# Altium PCB PDB_first.PcbDoc
Units mm, origin at the board's own origin, x right, y up, seen from the top; angles counter-clockwise.
Board outline 197.49 x 119.01 mm, 2 copper layers (Top Layer, Bottom Layer); 57 components, 42 nets, 148 pads, 301 vias.
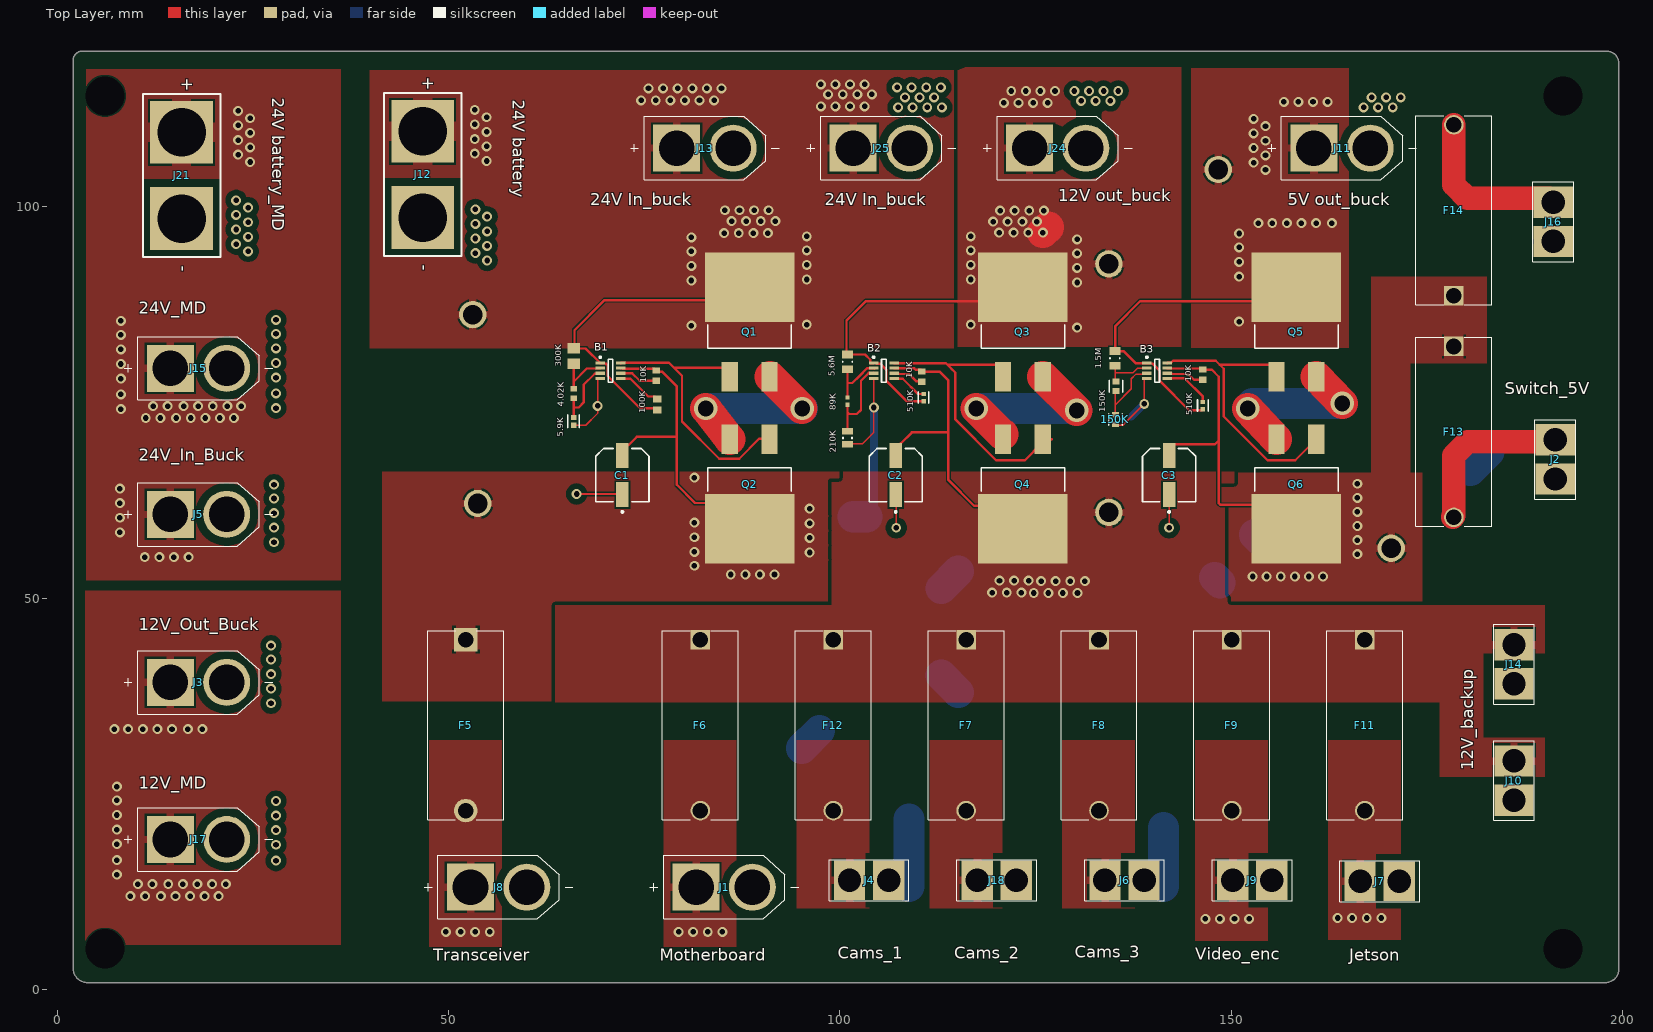
[diagram p0: Top Layer view]
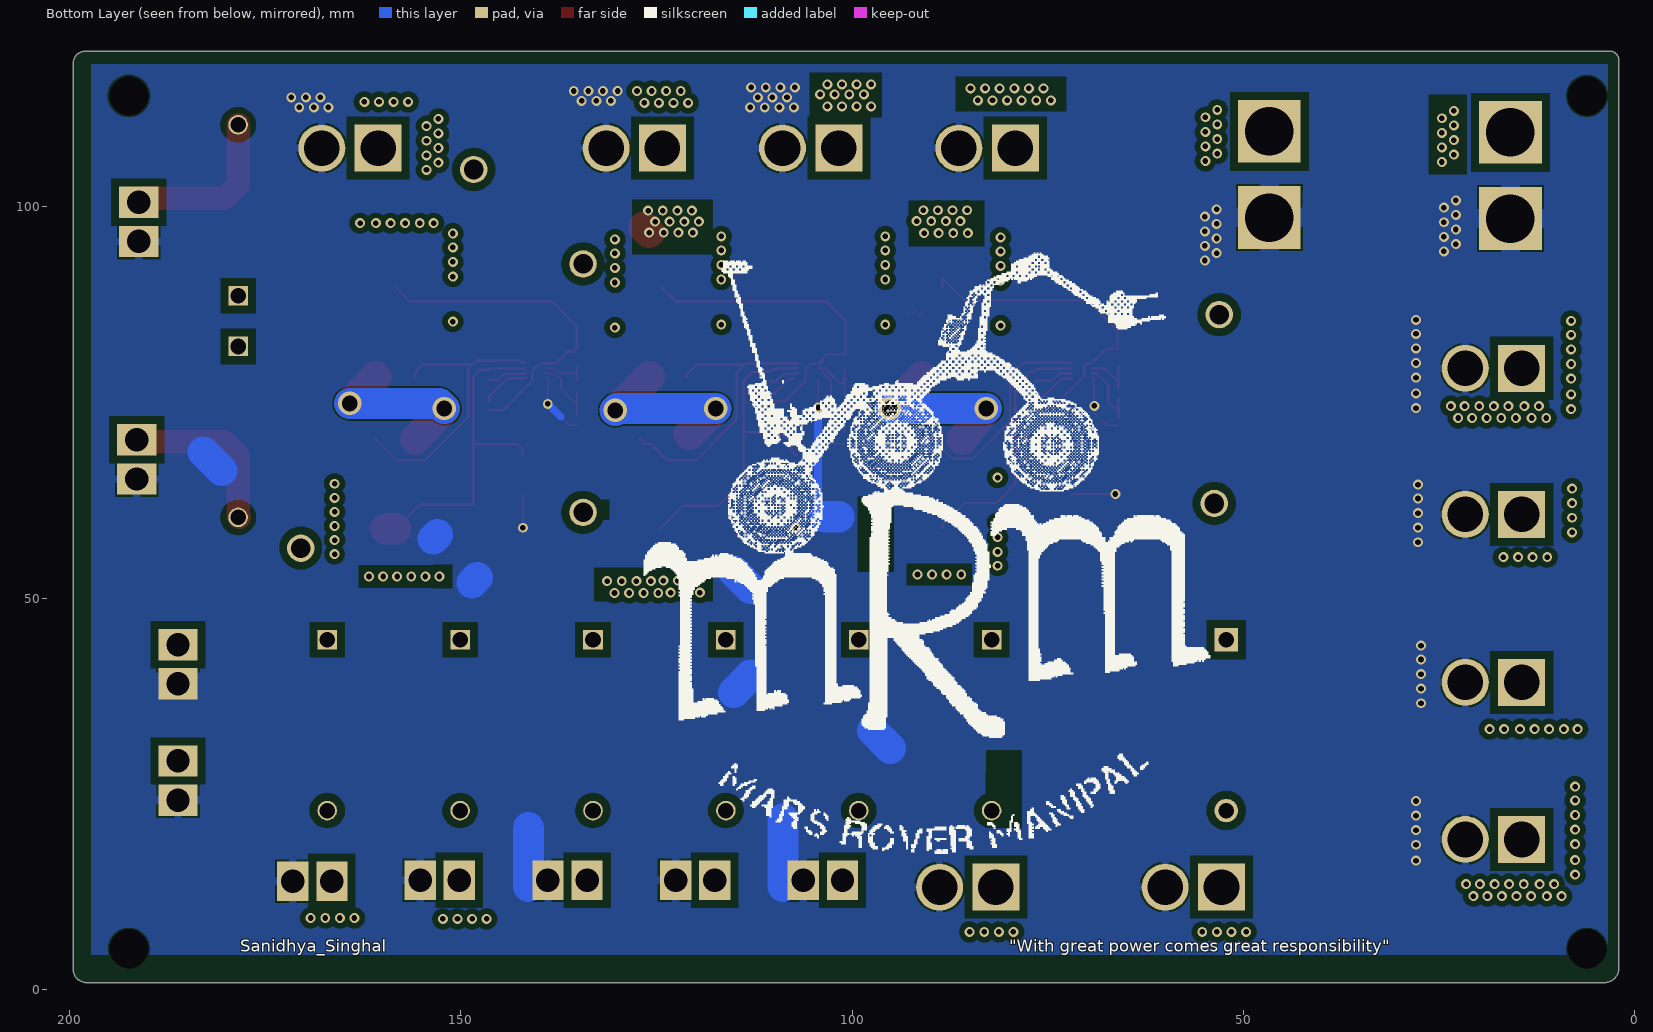
[diagram p1: Bottom Layer view, seen from below]
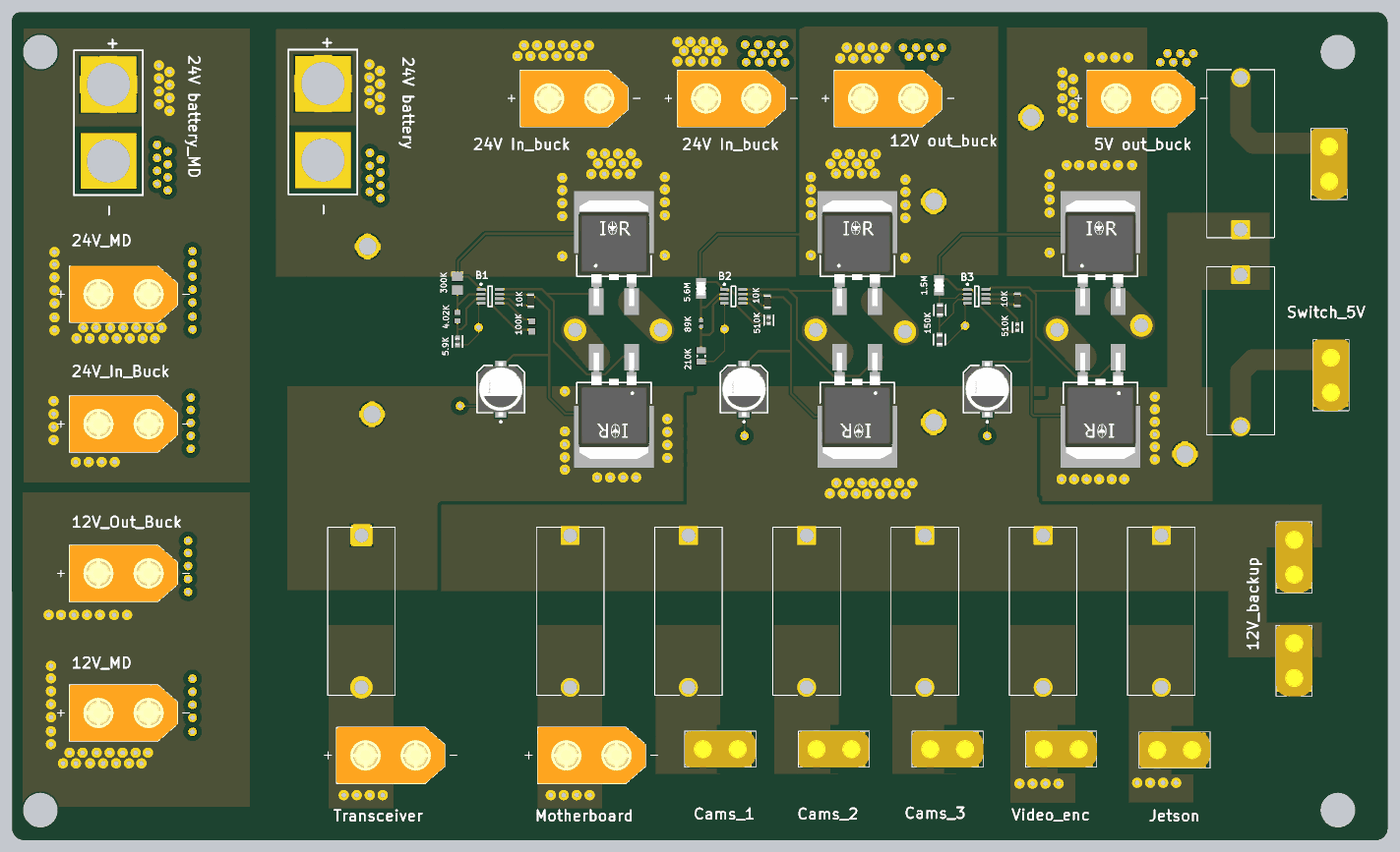
[diagram p2: 3D render of the assembled board from above, using the file's embedded part models]

## Layer stack, top to bottom
Top Solder: solder mask 0.0102, Solder Resist, Dk 3.5
Top Layer: signal copper 0.0356
Dielectric 1: dielectric 0.32, FR-4, Dk 4.8
Bottom Layer: signal copper 0.0356
Bottom Solder: solder mask 0.0102, Solder Resist, Dk 3.5

## Board outline
2.032,2.698 2.026,118.742 cw(c3.18,118.742) 3.18,119.896 198.115,119.888 197.988,119.893 cw(c197.988,118.364) 199.517,118.364 199.517,2.6 cw(c197.808,2.6) 197.808,0.891 3.841,0.889 cw(c3.841,2.698)

## Design rules (kind name [scope] priority, off if disabled: settings)
Clearance [All] p1: gap=0.2 ignorepadtopadclearanceinfootprint=FALSE except(0.5: Poly-Poly; 0.7: Via-Fill Via-Poly Via-Region; 1: THPad-Fill THPad-Poly THPad-Region)
PlaneClearance [All] p1: clearance=2
PlaneConnect [All] p1: planeconnectstyle=Direct reliefexpansion=0.508 reliefentries=4 reliefconductorwidth=0.254 reliefairgap=1
PolygonConnect [All] p1: thpad.connectstyle=Relief thpad.reliefconductorwidth=1 thpad.reliefentries=4 thpad.polygonreliefangle="90 Angle" thpad.airgapwidth=0.254 smdpad.connectstyle=Direct smdpad.reliefconductorwidth=1 smdpad.reliefentries=4 smdpad.polygonreliefangle="90 Angle" smdpad.airgapwidth=0.254 via.connectstyle=Direct via.reliefconductorwidth=1 via.reliefentries=4 via.polygonreliefangle="90 Angle" via.airgapwidth=0.254
RoutingTopology [All] p1: topology=Daisy_Balanced
RoutingVias [All] p1: holewidth=0.711 width=1.27 viastyle="Through Hole" minholewidth=0.711 minwidth=1.27 maxholewidth=0.711 maxwidth=1.27
SolderMaskExpansion [All] p1: expansion=0.102 istentingtop=FALSE
SupplyNets "Schematic Supply Nets_2" [InNet('VCC')] p1: voltage=0.000
SupplyNets "Schematic Supply Nets_1" [InNet('+5')] p2: voltage=0.000
SupplyNets "Schematic Supply Nets_3" [InNet('+12')] p3: voltage=0.000
SupplyNets "Schematic Supply Nets" [InNet('GND')] p4: voltage=0.000
Width [All] p1: maxlimit=20 minlimit=0.05 preferedwidth=5 minimp=50.000000 maximp=50.000000 favimp=50.000000
27 further rules are at their usual default settings.

## Classes and differential pairs
component class PDB_first: 1 2 3 4 5 7 8 B1 B2 B3 C1 C2 C3 F? J6 J8 J13 J15 J17 J18 J19 J20 J21 Q2 Q4 Q5

## Components (designator, comment, footprint, x,y, rotation, side; value= is the part's Value field where it differs from the comment)
1.5M "Comment" FP-CRCW0805-e3-IPC_B 135.128,80.645 r90 top
4.02K "4.02K" RESC1608X55X30LL15T15 65.979,76.144 r90 top (schematic designator R2)
5.6M "Comment" RESC1005X40X25NL05T05 100.965,75.184 r90 top
5.9K "5.9K" FP-ERJ2RK-IPC_A 65.979,72.588 r270 top (schematic designator R1)
10K "CRCW060310K0FKEA" RESC1609X50X30NL8T20 146.37,78.557 r90 top (schematic designator R15)
10K "CRCW060310K0FKEA" RESC1609X50X30NL8T20 110.473,78.303 r90 top (schematic designator R10)
10K "CRCW060310K0FKEA" RESC1609X50X30NL8T20 76.52,78.43 r90 top (schematic designator R5)
89K "Comment" FP-CRCW0805-e3-IPC_B 100.965,80.199 r90 top
100K "100K" RESC1608X55X30ML15T15 76.648,74.743 r270 top (schematic designator R4)
150K "Comment" FP-CRCW0603-e3-IPC_C 135.255,77.089 r90 top
150K "Comment" FP-CRCW0603-e3-IPC_C 135.194,72.837 r90 top
210K "Comment" RESC2013X50X30LL20T20 100.965,70.485 r90 top
300K "300K" RESC2013X70X40ML20T20 65.979,80.937 r90 top (schematic designator R3)
510K "ERJ-2RKF5103X" FP-ERJ2RK-IPC_B 146.37,74.62 r270 top (schematic designator R14)
510K "ERJ-2RKF5103X" FP-ERJ2RK-IPC_B 110.683,75.636 r270 top (schematic designator R9)
B1 "LTC4365ITS8#TRMPBF" LT-TS8-8-TSOT-23_V 70.679,79.065 r0 top
B2 "LTC4365ITS8#TRMPBF" LT-TS8-8-TSOT-23_V 105.603,79.065 r0 top
B3 "LTC4365ITS8#TRMPBF" LT-TS8-8-TSOT-23_V 140.528,79.065 r0 top
C1 "EEEFT1V101AP" FP-FTD-MFG 72.203,65.73 r90 top
C2 "EEEFT1V101AP" FP-FTD-MFG 107.127,65.73 r90 top
C3 "EEEFT1V101AP" FP-FTD-MFG 142.052,65.73 r90 top
F5 "4527" FUSE_4527#1 52.197,33.782 r270 top
F6 "4527" FUSE_4527#2 82.169,33.782 r270 top
F7 "4527" FUSE_4527#2 116.123,33.782 r270 top
F8 "4527" FUSE_4527#2 133.1,33.782 r270 top
F9 "4527" FUSE_4527#2 150.076,33.782 r270 top
F11 "4527" FUSE_4527#2 167.053,33.782 r270 top
F12 "4527" FUSE_4527#2 99.146,33.782 r270 top
F13 "4527" FUSE_4527#2 178.435,71.249 r270 top
F14 "4527" FUSE_4527#3 178.435,99.57 r270 top
J1 "XT60-M" AMASS_XT60-M#1 85.217,13.081 r0 top
J2 "XT30PB" XT30PB 191.389,70.231 r0 top
J3 "XT60-M" AMASS_XT60-M#1 18.034,39.243 r0 top
J4 "XT30PB" XT30PB 101.219,13.97 r90 top
J5 "XT60-M" AMASS_XT60-M#1 18.034,60.706 r0 top
J6 "XT30PB" XT30PB 133.858,13.97 r90 top
J7 "XT30PB" XT30PB 166.45,13.843 r90 top
J8 "XT60-M" AMASS_XT60-M#1 56.388,13.081 r0 top
J9 "XT30PB" XT30PB 150.177,13.97 r90 top
J10 "XT30PB" XT30PB 186.121,29.201 r0 top
J11 "XT60-M" AMASS_XT60-M#1 164.15,107.513 r0 top
J12 "xt90" xt90 46.675,104.14 r270 top
J13 "XT60-M" AMASS_XT60-M#1 82.743,107.513 r0 top
J14 "XT30PB" XT30PB 186.121,44.06 r0 top
J15 "XT60-M" AMASS_XT60-M#1 18.034,79.375 r0 top
J16 "XT30PB" XT30PB 191.135,100.584 r0 top
J17 "XT60-M" AMASS_XT60-M#1 18.034,19.177 r0 top
J18 "XT30PB" XT30PB 117.538,13.97 r90 top
J21 "xt90" xt90 15.875,104.013 r270 top (schematic designator J13)
J24 "XT60-M" AMASS_XT60-M#1 127.828,107.513 r0 top
J25 "XT60-M" AMASS_XT60-M#2 105.285,107.513 r0 top
Q1 "IRLZ44NSTRLPBF" FP-PG-TO263-3-MFG 88.458,85.288 r0 top
Q2 "IRLZ44NSTRLPBF" FP-PG-TO263-3-MFG 88.458,63.317 r180 top
Q3 "IRLZ44NSTRLPBF" FP-PG-TO263-3-MFG 123.383,85.288 r0 top
Q4 "IRLZ44NSTRLPBF" FP-PG-TO263-3-MFG 123.383,63.317 r180 top
Q5 "IRLZ44NSTRLPBF" FP-PG-TO263-3-MFG 158.308,85.288 r0 top
Q6 "IRLZ44NSTRLPBF" FP-PG-TO263-3-MFG 158.308,63.317 r180 top

## Footprints (in the part's own frame and the unit in brackets; to place one, negate y for a bottom-side part, rotate by r counter-clockwise, add the part's x,y. Pads: shape width x height; smd on the part's side, far side on the other; paste and mask are expansions set on the pad)
AMASS_XT60-M#1 [mm]
  round 6 hole 4.55: N(3.6,0)
  rect 6x6 / inner round 6 / far side rect 6x6 hole 4.55: P(-3.6,0)
  silkscreen extent -9.5,-4.05 9.5,4.05, body extent -7.75,-4.05 7.75,4.05, height 16
AMASS_XT60-M#2 [mm]
  round 6 hole 4.55: N(3.6,0)
  rect 6x6 hole 4.55: P(-3.6,0)
  silkscreen extent -9.5,-4.05 9.5,4.05, body extent -7.75,-4.05 7.75,4.05, height 16
FP-CRCW0603-e3-IPC_C [mm]
  rect 0.735x0.862 smd paste+0 mask+0: 1(-0.615,0) 2(0.615,0)
  silkscreen extent -0.75,-0.85 0.75,0.85, body extent -1.08,-0.58 1.08,0.58, height 0.25
FP-CRCW0805-e3-IPC_B [mm]
  rect 1.007x1.408 smd paste+0 mask+0: 1(-0.951,0) 2(0.951,0)
  silkscreen extent -0.07,-0.63 0.07,0.63, body extent -1.7,-0.95 1.7,0.95, height 0.25
FP-ERJ2RK-IPC_A [mm]
  rect 0.668x0.672 smd paste+0 mask+0: 1(-0.502,0) 2(0.502,0)
  silkscreen extent -0.84,-0.74 0.84,0.74, body extent -1.04,-0.54 1.04,0.54, height 0.25
FP-ERJ2RK-IPC_B [mm]
  rect 0.568x0.572 smd paste+0 mask+0: 1(-0.452,0) 2(0.452,0)
  silkscreen extent -0.74,-0.69 0.74,0.69, body extent -0.89,-0.44 0.89,0.44, height 0.25
FP-FTD-MFG [mm]
  rect 3.2x1.6 smd paste+0 mask+0: 1(-2.5,0) 2(2.5,0)
  silkscreen extent -4.82,-3.4 3.4,3.4, body extent -4.35,-3.65 4.35,3.65, height 0.25
FP-PG-TO263-3-MFG [mm]
  rect 2.08x3.81 smd paste+0 mask+0: 1(-2.54,-6.985) 3(2.54,-6.985)
  rect 11.43x8.89 smd paste+0 mask+0: 4(0,4.445)
  silkscreen extent -5.34,-3.36 5.34,-0.38, body extent -5.81,-8.99 5.81,8.99, height 0.25
FUSE_4527#1 [mm]
  rect 3x3 hole 2: 1(-10.92,0)
  round 3 hole 2: 2(10.92,0)
  silkscreen extent -12.08,-4.85 12.08,4.85
FUSE_4527#2 [mm]
  rect 2.5x2.5 hole 2: 1(-10.92,0)
  round 2.5 hole 2: 2(10.92,0)
  silkscreen extent -12.08,-4.85 12.08,4.85
FUSE_4527#3 [mm]
  round 2.5 hole 2: 1(-10.92,0)
  rect 2.5x2.5 hole 2: 2(10.92,0)
  silkscreen extent -12.08,-4.85 12.08,4.85
LT-TS8-8-TSOT-23_V [mm] "SOT23, 8-Leads, Body 2.9x1.75mm, Pitch 0.65mm"
  rect 1.22x0.4 smd: 1(-1.31,0.975) 2(-1.31,0.325) 3(-1.31,-0.325) 4(-1.31,-0.975) 5(1.31,-0.975) 6(1.31,-0.325) 7(1.31,0.325) 8(1.31,0.975)
  silkscreen extent -1.43,-1.45 0.3,1.85, body extent -0.87,-1.45 0.88,1.45, height 1
RESC1005X40X25NL05T05 [mm] "Chip Resistor, 2-Leads, Body 1.00x0.50mm, IPC Medium Density"
  rect 0.55x0.55 smd: 1(-0.45,0) 2(0.45,0)
  body extent -0.53,-0.27 0.53,0.28, height 0.4
RESC1608X55X30LL15T15 [mm] "Chip Resistor, 2-Leads, Body 1.60x0.80mm, IPC High Density"
  rect 0.7x0.85 smd: 1(-0.625,0) 2(0.625,0)
  body extent -0.87,-0.48 0.87,0.48, height 0.55
RESC1608X55X30ML15T15 [mm] "Chip Resistor, 2-Leads, Body 1.60x0.80mm, IPC Low Density"
  rect 0.9x1.05 smd: 1(-0.725,0) 2(0.725,0)
  body extent -0.87,-0.48 0.87,0.48, height 0.55
RESC1609X50X30NL8T20 [mm] "Chip Resistor, 2-Leads, Body 1.65x0.95mm, IPC Medium Density"
  rect 0.8x0.95 smd: 1(-0.65,0) 2(0.65,0)
  body extent -0.82,-0.48 0.82,0.48, height 0.5
RESC2013X50X30LL20T20 [mm] "Chip Resistor, 2-Leads, Body 2.00x1.25mm, IPC High Density"
  rect 0.85x1.35 smd: 1(-0.825,0) 2(0.825,0)
  silkscreen extent -0.1,-0.58 0.1,0.58, body extent -1.1,-0.72 1.1,0.72, height 0.5
RESC2013X70X40ML20T20 [mm] "Chip Resistor, 2-Leads, Body 2.00x1.25mm, IPC Low Density"
  rect 1.35x1.55 smd: 1(-0.975,0) 2(0.975,0)
  body extent -1.1,-0.72 1.1,0.72, height 0.7
XT30PB [mm]
  rect 5x4 hole 3: 1(0,0) 2(0,-5)
  silkscreen extent -2.6,-7.6 2.6,2.6, body extent -2.6,-7.6 2.6,2.6, height 10.66
xt90 [mm]
  rect 8x8 hole 6.2: 1(-5.5,0) 2(5.5,0)
  silkscreen extent -10.4,-4.95 10.4,4.95

## Part data
4.02K: library part CMP-1012-00578-2, Manufacturer=Panasonic, Part Number=ERJ-3EKF4021V
5.9K: library part CMP-2002-01005-2, "RES SMD 5.9K OHM 1% 1/10W 0402", Case Code (Imperial)=0402, Case Code (Metric)=1005, Max Operating Temperature=155°C, Max Power Dissipation=100mW, Min Operating Temperature=-55°C, Package Quantity=1, Resistance=5.9kR, Resistance Tolerance=1%, Resistor Type="Thick Film", Temperature Coefficient=100ppm/°C, Voltage Rating=50V, Case/Package=0402, Construction=Rectangular, Contact Plating=Tin, Depth=0.5mm, Features="Automotive AEC-Q200", Height=0.016inch, Lead Free="Lead Free", Length=1mm, Military Standard=Not, Mount="Surface Mount", Number of Terminations=2, Packaging="Tape and Reel", Power Rating=100mW, RoHS Compliant=Yes, Series=ERJ, Termination=SMD/SMT, Tolerance=1%, Voltage Rating (DC)=50V, Width=0.02inch
10K 10K 10K: library part CMP-1666-00005-4, "Chip Resistor, 10 KOhm, +/- 1%, 100 mW, -55 to 155 degC, 0603 (1608 Metric), RoHS, Tape and Reel", Manufacturer="Vishay Semiconductor", Max Operating Temperature="155 degC", Min Operating Temperature="-55 degC", Package Quantity=5000, Voltage Rating="75 V", ComponentLink1Description="Manufacturer URL", ComponentLink1URL=http://www.vishay.com/, ComponentLink2Description=Datasheet, ComponentLink2URL=https://datasheet.ciiva.com/11809/0900766b80d98afc-11809037.pdf, DatasheetVersion=06/2012, Height="0.45 mm", Length="1.55 mm", Mounting Technology="Surface Mount", PackageDescription="2-Pin Surface Mount Device, Body 1.575 x 0.85 mm", PackageReference=0603, Packaging="Tape and Reel", REACH SVHC=Unknown, RoHSCompliant=true
100K: library part CMP-2000-00182-1, Manufacturer=Panasonic, Part Number=ERJ-3EKF1003V
300K: library part CMP-2001-00397-1, Manufacturer=Panasonic, Part Number=ERJ-6GEYJ304V
510K 510K: library part CMP-2002-00972-2, "RES SMD 510K OHM 1% 1/10W 0402", Case Code (Imperial)=0402, Case Code (Metric)=1005, Max Operating Temperature=155°C, Max Power Dissipation=100mW, Min Operating Temperature=-55°C, Package Quantity=10000, Resistance=510kR, Resistance Tolerance=1%, Resistor Type="Thick Film", Temperature Coefficient=100ppm/°C, Voltage Rating=50V, Case/Package=0402, Construction=Rectangular, Contact Plating=Tin, Depth=0.5mm, Height=0.35mm, Lead Free="Lead Free", Length=1mm, Military Standard=Not, Mount="Surface Mount", Number of Terminations=2, Packaging="Tape and Reel", Power Rating=100mW, Radiation Hardening=No, REACH SVHC="No SVHC", RoHS Compliant=Yes, Series=ERJ, Technology="THICK FILM", Termination=SMD/SMT, Tolerance=1%, Voltage Rating (DC)=50V, Width=0.02inch
B1 B2 B3: library part CMP-0474-00861-1, "UV, OV and Reverse Supply Protection Controller, 2.5 to 34 V Vin, 8-pin SOT23 (TS8-8), -40 to 85 degC, Pb-Free, Mini Tape and Reel", Extended Temp="C, I, H", Manufacturer="Linear Technology", Power Good=no, Active Limiting=no, Circuit Breakers(#)=1, Code_JEDEC=MO-193, ComponentLink1Description="Manufacturer URL", ComponentLink1URL=http://www.linear.com/, ComponentLink2Description=Datasheet, ComponentLink2URL=http://cds.linear.com/docs/en/datasheet/4365f.pdf, ComponentLink3Description="Package Specification", ComponentLink3URL=http://cds.linear.com/docs/en/packaging/SOT_8_05-08-1637.pdf, Fast Comparator=no, Fault=yes, Foldback=no, Mounting Technology="Surface Mount", PackageDescription="8-Pin Plastic TSOT-23, Body 2.9 x 1.63 mm, Pitch 0.65 mm", PackageReference=TS8-8, PackageVersion="Rev. A, 08/2010", Packing="Mini Tape and Reel", PartNumber=LTC4365ITS8#TRMPBF, Reset=no, RoHS=TRUE, Vin Range="2.5 to 34 V"
C1 C2 C3: library part CMP-05427-000027-1, "CAP ALUM 100UF 20% 35V SMD", Capacitance=100uF, Case/Package=Radial, ESR (Equivalent Series Resistance)=260mR, Leakage Current=35uA, Max Operating Temperature=105°C, Min Operating Temperature=-55°C, Package Quantity=1000, Ripple Current=300mA, Tolerance=20%, Voltage=35V, Construction=Cylindrical, Contact Plating=Tin, Diameter=6.3mm, Height=5.8mm, Height - Seated (Max)=0.24inch, Lead Diameter=0.65mm, Lead Pitch=1.8mm, Length=5.8mm, Life (Hours)=2000Hour, Mount="Surface Mount", Number of Pins=2, Packaging="Tape and Reel", Polarity=Polar, Radiation Hardening=No, REACH SVHC="No SVHC", Ripple Current (AC)=300mA, RoHS Compliant=Yes, Series=FT, Termination=SMD/SMT, Voltage Rating=35V, Voltage Rating (DC)=35V
F5 F6 F7 F8 F9 F11 F12 F13 F14: "Fuseholder; 5 A; 250 V; Nylon; Base only; Brass, Tin Plate (Contact)", Package=None, Availability=Unavailable, MP=4527, Price=None
J1 J3 J5 J8 J11 J13 J15 J17 J24 J25: "Plug; DC supply; XT60; male; PIN: 2; for cable; soldered; 30A; 500V", Package=Package, Check_prices=https://www.snapeda.com/parts/XT60-M/AMASS/view-part/?ref=eda, MF=AMASS, MP=XT60-M, SnapEDA_Link=https://www.snapeda.com/parts/XT60-M/AMASS/view-part/?ref=snap
  J1 J3 J5 J8 J11 J13 J15 J17: Availability="Not in stock", Price=None
J2 J4 J6 J7 J9 J10 J14 J16 J18: "Connector", Manufacturer_Name=Amass, Datasheet Link=https://www.tme.eu/Document/4acc913878197f8c2e30d4b8cdc47230/XT30UPB%20SPEC.pdf, Height=10.7mm, Manufacturer_Part_Number=XT30PB
Q1 Q2 Q3 Q4 Q5 Q6: library part CMP-32901-000495-1, "MOSFET N-CH 55V 47A D2PAK", Case/Package=D2PAK, Continuous Drain Current (ID)=47A, Drain to Source Breakdown Voltage=55V, Drain to Source Resistance=35mR, Gate to Source Voltage (Vgs)=16V, Input Capacitance=1.7nF, Max Operating Temperature=175°C, Max Power Dissipation=3.8W, Min Operating Temperature=-55°C, Power Dissipation=110W, Threshold Voltage=2V, Drain to Source Voltage (Vdss)=55V, Element Configuration=Single, Halogen Free="Halogen Free", Height=0.19inch, Lead Free="Contains Lead", Length=0.42inch, Max Dual Supply Voltage=55V, Mount="Surface Mount", Number of Pins=3, Packaging="Tape and Reel", Rds On Max=22mR, REACH SVHC="No SVHC", RoHS Compliant=Yes, Turn-Off Delay Time=26ns, Turn-On Delay Time=11ns, Width=0.38inch

## Free pads (board coordinates)
  round 3.5 hole 2.5: 15(53.086,86.233) 15(53.721,62.103) 15(134.366,60.96) 15(134.366,92.71) 15(148.336,104.775) 15(170.434,56.388)
  round 1.524 hole 5 unplated: 17(6.096,5.207) 17(6.096,114.181) 17(192.397,5.207) 17(192.397,114.181)

## Via types
v1: diameter 1.27, hole 0.711, Top Layer to Bottom Layer, 295 vias
v2: diameter 3, hole 2, Top Layer to Bottom Layer, 6 vias

## Nets (pads, with @x,y where several pads share a name; then routed paths per layer and width w, separated by ;. In a path a pad name is that pad's centre, name@x,y a point inside that pad or via, vN(x,y) a via of type N, cw(c..) or ccw(c..) an arc to the next point about the centre after c; other vN are vias at no path point)
+5: 
+12: J3.P J17.P
  other v1: 9.346,11.938 11.211,11.938 13.237,11.938 15.102,11.938 16.966,11.938 18.831,11.938 20.603,11.938 10.287,13.462 12.151,13.462 14.178,13.462 16.043,13.462 17.907,13.462 19.771,13.462 21.544,13.462 7.62,14.68 7.62,16.545 7.62,18.571 7.62,20.436 7.62,22.3 7.62,24.165 7.62,25.937 7.285,33.274 9.058,33.274 10.922,33.274 12.786,33.274 14.651,33.274 16.678,33.274 18.542,33.274
GND: 5.9K.2 150K.1@135.194,72.221 210K.1 B1.4 B2.4 B3.4 C1.1 C2.1 C3.1 J1.N J2.2 J3.N J4.2 J5.N J6.2 J7.2 J8.N J9.2 J10.2 J11.N J12.2 J13.N J14.2 J15.N J16.2 J17.N J18.2 J21.2 J24.N J25.N | length 91.8
  Top Layer w0.2: 5.9K.2@65.938,72.088 67.511,72.088 69.028,73.605 v1(69.028,74.583) 69.028,77.99 69.128,78.09 B1.4 ; v1(66.36,63.317) 71.858,63.317 C1.1@72.203,62.972 ; 210K.1 101.215,69.66 101.278,69.723 102.87,69.723 104.333,71.186 v1(104.333,74.366) 104.333,78.049 B2.4@104.361,78.078 ; v1(107.19,58.999) C2.1@107.19,62.33 ; 150K.1@135.194,72.086 136.122,72.086 v1(138.877,74.841) 138.877,77.99 138.977,78.09 B3.4 ; v1(142.052,58.999) C3.1
  Bottom Layer w1: 103.444,60.396 104.333,61.285 v1(104.333,74.366) ; 137.226,73.19 v1(138.877,74.841)
  Bottom Layer w4: J1.N J1.N@88.817,13.191 ; 95.126,30.825 97.392,33.091 ; 101.666,60.396 103.444,60.396 ; 108.823,13.208 108.823,21.786 108.825,21.788 ; 112.933,40.147 115.128,37.951 ; 112.933,51.251 115.128,53.446 ; 141.335,13.208 141.335,20.685 ; 147.894,52.649 148.552,51.991 ; 152.974,58.11 153.523,57.561 ; J11.N@167.407,107.513 J11.N J11.N@167.75,106.972 ; 180.533,66.305 182.912,68.684 ; J16.2@190.635,95.584 J16.2
  other v1: 27.94,16.469 27.94,18.496 27.94,20.361 27.94,22.225 27.94,24.089 27.305,36.576 27.305,38.44 27.305,40.305 27.305,42.169 27.305,43.942 27.686,57.15 27.686,59.014 27.686,60.879 27.686,62.743 27.686,64.516 27.94,74.295 27.94,76.159 27.94,78.186 27.94,80.051 27.94,81.915 27.94,83.779 27.94,85.552 54.93,93.151 53.406,94.092 24.384,94.304 54.93,95.016 22.86,95.245 53.406,95.956 24.384,96.168 54.93,96.88 22.86,97.109 53.406,97.821 24.384,98.033 54.93,98.745 22.86,98.974 53.406,99.685 24.384,99.897 22.86,100.838 107.421,112.72 109.286,112.72 111.15,112.72 113.015,112.72 166.903,112.72 168.768,112.72 170.632,112.72 130.81,113.538 132.674,113.538 134.539,113.538 108.31,113.99 110.175,113.99 112.039,113.99 167.919,113.99 169.784,113.99 171.648,113.99 129.962,114.808 131.826,114.808 133.69,114.808 135.555,114.808 107.294,115.26 109.159,115.26 111.023,115.26 112.888,115.26
NetB1_1: 100K.2 300K.2 B1.1 J12.1 J13.P J25.P pad.15@53.086,86.233 Q1.4 | length 43.3
  Top Layer w0.3: 300K.2 300K.2@66.079,81.912 ; B1.1@69.369,79.99 69.955,79.99 70.005,79.94 70.124,79.94 70.329,79.735 70.329,78.398 74.455,74.272 76.394,74.272 100K.2 ; B1.1 67.497,81.912 300K.2@66.079,81.912 ; Q1.4 88.458,90.876 85.664,88.082 69.916,88.082 66.079,84.245 300K.2@66.079,81.912
  other v1: 81.026,84.836 95.758,84.963 81.026,90.592 95.758,90.719 81.026,92.456 95.758,92.583 81.026,94.32 95.758,94.447 81.026,96.093 95.758,96.22 85.206,96.647 87.07,96.647 88.935,96.647 90.799,96.647 86.147,98.171 88.011,98.171 89.875,98.171 91.74,98.171 85.298,99.568 87.163,99.568 89.027,99.568 90.891,99.568 54.864,105.861 53.34,106.802 54.864,107.725 53.34,108.666 54.864,109.59 53.34,110.531 54.864,111.454 53.34,112.395 97.55,112.847 99.414,112.847 101.279,112.847 103.143,112.847 74.598,113.609 76.463,113.609 78.327,113.609 80.192,113.609 82.056,113.609 83.921,113.609 98.49,114.371 100.355,114.371 102.219,114.371 104.084,114.371 75.539,115.133 77.403,115.133 79.268,115.133 81.132,115.133 82.997,115.133 84.861,115.133 97.556,115.641 99.42,115.641 101.285,115.641 103.149,115.641
NetB1_2: 4.02K.2 300K.1 B1.2 | length 6.9
  Top Layer w0.3: 4.02K.2 65.979,77.668 ; 300K.1@65.979,79.614 65.979,77.668 ; B1.2@69.369,79.34 67.651,79.34 65.979,77.668
NetB1_3: 4.02K.1 5.9K.1 B1.3 | length 9
  Top Layer w0.3: 5.9K.1 65.979,74.366 ; 4.02K.1 65.979,74.366 ; B1.3 69.319,78.69 68.664,78.69 67.249,77.275 67.249,75.001 66.614,74.366 65.979,74.366
NetB1_5: 100K.1 B1.5 | length 5.8
  Top Layer w0.3: B1.5@71.915,78.049 73.218,78.049 75.499,75.768 76.348,75.768 100K.1
NetB1_6: 10K.1@76.52,77.78 B1.6 | length 4.9
  Top Layer w0.3: B1.6 73.447,78.74 74.407,77.78 10K.1@76.52,77.78
NetB1_7: 10K.2@76.52,79.08 B1.7 C1.2 F5.1 pad.15@53.721,62.103 Q2.4 | length 41
  Top Layer w0.3: B1.7@71.989,79.34 B1.7@72.039,79.34 ; B1.7 B1.7@72.039,79.34 ; C1.2 72.203,68.772 73.426,69.996 73.426,69.998 74.054,70.625 79.16,70.625 ; Q2.4 88.459,58.873 88.459,59.376 85.665,62.17 81.474,62.17 79.16,64.484 79.16,70.625 ; B1.7@72.039,79.34 72.187,79.34 72.187,79.33 76.27,79.33 76.52,79.08 76.649,78.951 77.269,78.951 79.16,77.06 79.16,70.625
  other v1: 86.045,53.03 87.909,53.03 89.774,53.03 91.638,53.03 81.407,54.148 96.126,55.841 81.407,55.921 96.126,57.705 81.407,57.785 96.126,59.57 81.407,59.649 96.126,61.434 81.407,65.405
NetB1_8: B1.8 Q1.1 Q2.1 | length 35.5
  Top Layer w0.3: B1.8 72.039,80.09 78.159,80.09 78.803,79.446 ; Q1.1@85.918,79.446 78.803,79.446 ; Q2.1@90.706,70.513 90.579,70.386 89.685,70.386 87.124,67.825 84.585,67.825 79.822,72.588 79.822,78.427 78.803,79.446
NetB2_1: 89K.2 510K.2@110.683,75.184 B2.1 J24.P pad.15@134.366,92.71 Q3.4 | length 43.4
  Top Layer w0.3: B2.1 103.92,80.04 103.87,80.09 103.87,80.464 103.197,81.137 100.978,81.137 89K.2 100.838,81.277 100.838,85.477 103.317,87.955 122.557,87.955 Q3.4@124.335,89.733 ; B2.1@104.714,79.954 105.161,79.954 105.953,79.162 105.953,77.745 108.515,75.184 510K.2@110.683,75.184
  Top Layer w4: v1(125.923,96.718) 126.613,97.409
  other v1: 130.302,84.582 116.713,84.963 130.302,90.338 116.713,90.719 130.302,92.202 116.713,92.583 130.302,94.066 116.713,94.447 130.302,95.839 116.713,96.22 120.329,96.718 122.194,96.718 124.058,96.718 119.567,98.115 121.432,98.115 123.296,98.115 125.161,98.115 120.456,99.512 122.321,99.512 124.185,99.512 126.05,99.512 120.945,113.284 122.809,113.284 124.673,113.284 126.538,113.284 121.885,114.808 123.75,114.808 125.614,114.808 127.479,114.808
NetB2_2: 5.6M.2 89K.1 B2.2 | length 7.7
  Top Layer w0.2: 102.481,78.392 102.481,78.488 ; B2.2 B2.2@104.411,79.273
  Top Layer w0.3: 5.6M.2@100.965,75.909 100.965,77.49 ; 89K.1 100.965,77.49 ; B2.2 104.277,79.374 103.463,79.374 102.481,78.392 101.579,77.49 100.965,77.49
NetB2_3: 5.6M.1 210K.2 B2.3 | length 10.5
  Top Layer w0.2: B2.3 104.334,78.781 B2.3@104.334,78.873
  Top Layer w0.3: 210K.2 100.965,73.709 ; 100.965,74.459 100.965,73.709 ; B2.3@103.693,78.806 102.682,77.795 102.682,74.064 102.151,73.533 101.141,73.533 100.965,73.709
NetB2_5: 510K.1@110.683,76.089 B2.5 | length 4.2
  Top Layer w0.3: B2.5@107.344,78.049 108.016,78.049 109.977,76.089 510K.1@110.683,76.089
NetB2_6: 10K.1@110.473,77.653 B2.6 | length 4
  Top Layer w0.3: B2.6 106.963,78.69 107.499,78.69 107.549,78.64 108.822,78.64 109.724,77.738 110.388,77.738 10K.1@110.473,77.653
NetB2_7: 10K.2@110.473,78.953 B2.7 C2.2 F6.1 F7.1 F8.1 F9.1 F11.1 F12.1 J10.1 J14.1 pad.15@134.366,60.96 Q4.4 | length 42
  Top Layer w0.3: B2.7 109.481,79.39 109.668,79.203 110.306,79.203 110.556,78.953 112.715,78.953 113.858,77.81 113.858,71.191 ; C2.2 107.777,68.88 107.777,69.78 109.188,71.191 113.858,71.191 ; Q4.4@124.526,58.872 121.605,61.793 117.16,61.793 113.858,65.095 113.858,71.191
  other v1: 124.758,50.666 126.623,50.666 128.487,50.666 130.352,50.666 119.447,50.713 121.311,50.713 123.176,50.713 125.699,52.19 127.563,52.19 129.428,52.19 131.292,52.19 120.387,52.237 122.252,52.237 124.116,52.237
NetB2_8: B2.8 Q3.1 Q4.1 | length 38.1
  Top Layer w0.3: B2.8 113.518,80.04 113.731,79.827 ; Q3.1@121.096,78.299 121.096,78.684 119.953,79.827 113.731,79.827 ; 127.066,70.302 126.514,69.75 125.752,69.75 123.637,67.635 119.954,67.635 114.747,72.842 114.747,78.811 114.283,79.275 113.731,79.827
NetB3_1: 1.5M.2 510K.2@146.37,74.168 B3.1 J11.P pad.15@148.336,104.775 Q5.4 | length 43.3
  Top Layer w0.3: 510K.2@146.37,74.168 146.236,74.034 146.072,74.034 146.058,74.02 144.603,74.02 140.878,77.745 140.878,79.035 139.923,79.99 139.268,79.99 B3.1 137.775,80.04 136.243,81.572 135.534,81.572 135.194,81.912 135.194,84.78 138.369,87.955 156.53,87.955 Q5.4
  other v1: 151.003,85.344 151.003,91.1 151.003,92.964 151.003,94.828 151.003,96.601 153.462,97.917 155.235,97.917 157.099,97.917 158.963,97.917 160.828,97.917 162.855,97.917 154.371,104.719 152.847,105.66 154.371,106.584 152.847,107.524 154.371,108.448 152.847,109.389 154.371,110.313 152.847,111.253 156.713,113.411 158.577,113.411 160.442,113.411 162.306,113.411
NetB3_2: 1.5M.1 150K.2@135.255,77.704 B3.2 | length 6.2
  Top Layer w0.2: 1.5M.1 135.194,79.628 135.194,78.787 ; 150K.2@135.194,77.758 135.194,78.787 ; B3.2 138.001,79.39 137.398,78.787 135.194,78.787
NetB3_3: 150K.1@135.255,76.474 150K.2@135.194,73.452 B3.3 | length 9.4
  Top Layer w0.2: 150K.2@135.194,73.337 135.194,73.452 135.194,74.716 ; 150K.1@135.194,76.308 135.194,74.716 ; B3.3 138.808,78.74 138.658,78.59 137.767,78.59 137.226,78.049 137.226,76.748 135.194,74.716
NetB3_5: 510K.1@146.37,75.073 B3.5 | length 6.2
  Top Layer w0.3: B3.5 144.043,78.09 146.368,75.766 510K.1@146.368,75.073
NetB3_6: 10K.1@146.37,77.907 B3.6 | length 4.9
  Top Layer w0.3: B3.6 141.888,78.69 142.424,78.69 142.474,78.64 144.509,78.64 145.242,77.907 10K.1@146.37,77.907
NetB3_7: 10K.2@146.37,79.207 B3.7 C3.2 F13.1 F14.2 pad.15@170.434,56.388 Q6.4 | length 43.3
  Top Layer w0.3: B3.7 141.888,79.34 146.237,79.34 146.37,79.207 147.498,79.207 148.402,78.303 148.402,70.175 ; C3.2 142.052,69.03 142.702,69.68 147.907,69.68 148.402,70.175 ; Q6.4 155.26,61.92 148.633,61.92 148.402,62.152 148.402,70.175
  Top Layer w4: Q6.4 Q6.4@159.578,58.872
  other v1: 152.72,52.776 154.52,52.776 156.32,52.776 158.121,52.776 159.921,52.776 161.721,52.776 166.116,55.626 166.116,57.426 166.116,59.226 166.116,61.027 166.116,62.827 166.116,64.627
NetB3_8: B3.8 Q5.1 Q6.1 | length 37.3
  Top Layer w0.3: B3.8 141.888,80.09 142.298,80.09 142.543,80.335 148.021,80.335 148.529,79.827 ; Q5.1 155.768,78.948 154.889,79.827 148.529,79.827 ; Q6.1 158.169,67.623 154.637,67.623 149.037,73.223 149.037,79.319 148.529,79.827
NetF1_1: 
NetF2_1: F6.2 J1.P | length 0.6
  Top Layer w4: J1.P J1.P@82.169,13.081
  other v1: 79.375,7.366 81.239,7.366 83.104,7.366 84.968,7.366
NetF3_1: F13.2 J2.1 | length 21.7
  Top Layer w3: F13.2@178.308,60.329 178.308,60.392 178.435,60.519 178.435,68.22 180.192,69.977 191.135,69.977 J2.1
NetF4_1: F5.2 J8.P
  other v1: 49.657,7.366 51.521,7.366 53.386,7.366 55.25,7.366
NetF5_1: 
NetF6_1: F12.2 J4.1
NetF7_1: F8.2 J6.1
NetF8_1: F9.2 J9.1
  other v1: 146.685,9.017 148.549,9.017 150.414,9.017 152.278,9.017
NetF9_1: F11.2 J7.1
  other v1: 163.576,9.144 165.44,9.144 167.305,9.144 169.169,9.144
NetF10_1: F14.1 J16.1 | length 21.3
  Top Layer w3: F14.1 178.435,102.841 180.192,101.084 190.635,101.084 J16.1
NetF11_1: F7.2 J18.1
NetJ13_P: 
NetJ14_P: 
NetQ1_3: Q1.3 Q2.3 | length 23.2
  Top Layer w3: Q1.3 Q1.3@91.053,78.303 ; v2@95.117,74.239 v2(95.189,74.239)
  Top Layer w4: v2(82.87,74.239) Q2.3 ; Q1.3@91.053,78.303 v2@95.117,74.239
  Bottom Layer w4: v2(82.87,74.239) v2(95.189,74.239)
NetQ3_3: Q3.3 Q4.3 | length 23.8
  Top Layer w4: v2(117.414,74.239) 120.694,70.96 Q4.3@120.843,70.96 ; Q3.3 v2(130.241,73.985)
  Bottom Layer w4: v2(117.414,74.239) 129.987,74.239 v2(130.241,73.985)
NetQ5_3: Q5.3 Q6.3 | length 22.5
  Top Layer w4: v2(152.085,74.239) Q6.3 ; Q5.3 v2(164.169,74.879)
  Bottom Layer w4: v2(152.085,74.239) 152.725,74.879 v2(164.169,74.879)
netZ_1: 
VCC: J5.P J15.P J21.1
  other v1: 11.176,55.245 13.04,55.245 14.905,55.245 16.769,55.245 8.001,58.415 8.001,60.279 8.001,62.144 8.001,64.008 11.297,73.025 13.162,73.025 15.188,73.025 17.053,73.025 18.917,73.025 20.782,73.025 22.554,73.025 8.128,74.168 12.238,74.549 14.102,74.549 16.129,74.549 17.993,74.549 19.858,74.549 21.722,74.549 23.495,74.549 8.128,76.032 8.128,78.059 8.128,79.924 8.128,81.788 8.128,83.652 8.128,85.425 24.638,105.734 23.114,106.675 24.638,107.598 23.114,108.539 24.638,109.463 23.114,110.404 24.638,111.327 23.114,112.268

## Polygon pours and split planes (outlines as drawn)
NetB3_7 on Top Layer "NONET_L01_P-001" (solid, pour order 189): 171.831,91.059 171.831,80.01 182.626,80.01 182.626,91.059
NetB1_1 on Top Layer "Top Layer-NetB1_1" (solid, pour order 81): 114.554,117.475 39.944,117.475 39.944,98.771 39.944,81.928 114.554,81.928
NetB2_1 on Top Layer "Top Layer-NetB2_1" (solid, pour order 17): 114.935,82.113 143.637,82.113 143.637,117.856 114.935,117.856
NetB3_7 on Top Layer "NONET_L01_P-001" (solid, pour order 188): 167.898,63.246 172.847,63.246 172.847,91.059 167.894,91.059 167.894,63.5
NetF2_1 on Top Layer "Top Layer-NetF9_1" (solid, pour order 186): 77.488,5.461 86.759,5.461 86.759,31.822 77.488,31.822
NetF4_1 on Top Layer "Top Layer-NetF9_1" (solid, pour order 185): 47.516,5.461 56.787,5.461 56.787,31.822 47.516,31.822
NetF6_1 on Top Layer "Top Layer-NetF9_1" (solid, pour order 183): 94.465,10.414 103.736,10.414 103.736,31.822 94.465,31.822
NetF11_1 on Top Layer "Top Layer-NetF9_1" (solid, pour order 182): 111.441,10.414 120.712,10.414 120.712,31.822 111.441,31.822
NetF7_1 on Top Layer "Top Layer-NetF9_1" (solid, pour order 181): 128.418,10.414 137.689,10.414 137.689,31.822 128.418,31.822
NetF8_1 on Top Layer "Top Layer-NetF9_1" (solid, pour order 180): 145.395,6.223 154.666,6.223 154.666,31.822 145.395,31.822
NetB1_7 on Top Layer "Top Layer-NetB1_7" (solid, pour order 175): 41.529,36.83 65.151,36.83 65.151,48.006 99.888,48.006 99.888,66.167 41.529,66.167
+12 on Top Layer "NONET_L01_P-001" (solid, pour order 179): 3.556,50.927 3.556,5.715 36.195,5.715 36.195,50.927
NetB3_1 on Top Layer "NONET_L01_P-001" (solid, pour order 13): 144.907,117.729 144.907,81.986 165.039,81.986 165.039,117.729
NetB2_7 on Top Layer "NONET_L01_P-001" (solid, pour order 152): 98.933,66.167 150.368,66.167 150.368,48.585 98.933,48.585
NetF9_1 on Top Layer "Top Layer-NetF9_1" (solid, pour order 162): 162.372,6.35 171.643,6.35 171.643,31.822 162.372,31.822
NetB3_7 on Top Layer "NONET_L01_P-001" (solid, pour order 164): 148.783,66.04 148.783,48.768 174.371,48.768 174.371,66.04
NetB2_7 on Top Layer "Top Layer-NetB2_7" (solid, pour order 176): 176.657,27.178 190.058,27.178 190.058,32.202 182.184,32.202 182.184,42.997 190.058,42.997 190.058,49.093 179.898,49.093 63.627,49.093 63.627,36.703 176.657,36.703
VCC on Top Layer "NONET_L01_P-001" (solid, pour order 178): 3.683,117.602 3.683,52.324 36.195,52.324 36.195,117.602
GND on Bottom Layer "Bottom Layer-GND 1" (solid, pour order 97): 3.429,4.445 197.231,4.445 197.231,92.908 72.636,92.908 197.231,92.908 197.231,118.237 117.287,118.237 117.287,101.036 117.287,118.237 92.903,118.237 92.903,101.036 92.903,118.237 3.429,118.237
GND on Bottom Layer "NONET_L01_P-001" (solid, pour order 98): 35.626,60.523 35.626,52.014 55.819,52.014 55.819,60.523
GND on Bottom Layer "NONET_L01_P-001" (solid, pour order 112): 39.436,21.407 39.436,30.17 35.626,30.17 35.626,21.407
GND on Bottom Layer "NONET_L01_P-001" (solid, pour order 133): 190.312,36.18 180.152,36.18 180.152,40.457 190.312,40.457
GND on Bottom Layer "Bottom Layer-GND" (solid, pour order 141): 171.389,18.232 176.85,18.232 176.85,18.249 179.136,18.249 179.136,20.518 189.931,20.518 189.931,25.979 181.532,25.979 181.532,49.601 181.532,56.84 153.482,56.84 153.482,49.601 176.469,49.601 176.469,30.194 176.469,24.886 176.588,24.888 176.594,24.582 171.262,24.582
GND on Bottom Layer "NONET_L01_P-001" (solid, pour order 100): 30.038,21.026 39.563,21.026 39.563,60.523 30.038,60.523
GND on Bottom Layer "NONET_L01_P-001" (solid, pour order 122): 28.895,102.052 28.895,90.114 51.86,90.114 51.86,102.052
GND on Bottom Layer "NONET_L01_P-001" (solid, pour order 121): 35.118,101.544 28.895,101.671 28.895,72.588 35.118,72.588
GND on Bottom Layer "NONET_L01_P-001" (solid, pour order 120): 44.897,72.588 44.897,80.208 31.689,80.208 31.689,72.588

## Other copper
Top Layer:
  region: 92.242,87.513 92.246,87.514 92.252,87.515 92.254,87.516 92.258,87.515 92.263,87.513 92.264,87.511 92.269,87.51 92.271,87.515 92.275,87.521 92.277,87.523 92.281,87.524 92.286,87.521 92.287,87.516 92.284,87.513 92.28,87.512 92.279,87.507 92.279,87.492 92.28,87.49 92.282,87.486 92.282,87.477 92.281,87.473 92.28,87.467 92.282,87.466 92.278,87.458 92.277,87.453 92.276,87.445 92.277,87.443 92.276,87.44 92.277,87.435 92.276,87.432 92.275,87.425 92.271,87.419 92.27,87.408 92.271,87.396 92.272,87.392 92.273,87.389 92.271,87.384 92.267,87.38 92.264,87.379 92.259,87.384 92.255,87.391 92.253,87.393 92.252,87.396 92.247,87.405 92.245,87.413 92.246,87.424 92.247,87.428 92.249,87.432 92.247,87.449 92.243,87.455 92.242,87.459 92.237,87.467 92.236,87.469 92.234,87.47 92.233,87.474 92.234,87.479 92.233,87.48 92.236,87.483 92.237,87.489 92.238,87.492 92.238,87.495 92.238,87.497 92.241,87.5 92.241,87.502 92.234,87.504 92.233,87.507 92.234,87.509 92.235,87.511 92.241,87.513
  region: 92.397,87.543 92.402,87.542 92.407,87.539 92.406,87.537 92.401,87.536 92.38,87.537 92.378,87.538 92.382,87.542 92.386,87.543 92.396,87.543
  region: 92.728,86.933 92.731,86.93 92.73,86.922 92.728,86.92 92.721,86.921 92.719,86.926 92.72,86.933 92.725,86.934
  region: 91.871,86.922 91.866,86.919 91.863,86.92 91.861,86.925 91.862,86.945 91.861,86.948 91.863,86.954 91.866,86.954 91.867,86.953 91.869,86.939 91.872,86.936 91.873,86.931 91.872,86.923
  region: 92.716,87.063 92.719,87.067 92.721,87.066 92.722,87.061 92.721,87.053 92.72,87.05 92.717,87.051 92.716,87.053 92.715,87.057
  region: 92.087,87.098 92.085,87.098 92.084,87.101 92.082,87.102 92.084,87.106 92.087,87.107 92.089,87.105 92.088,87.102
  region: 92.4,87.389 92.399,87.4 92.401,87.405 92.406,87.414 92.408,87.414 92.411,87.407 92.412,87.401 92.414,87.393 92.412,87.389 92.411,87.383 92.409,87.379 92.406,87.379 92.402,87.381 92.401,87.383
  region: 91.825,86.03 91.828,86.031 91.829,86.03 91.826,86.027 91.824,86.028 91.824,86.03
  region: 92.95,86.246 92.95,86.244 92.946,86.245 92.946,86.247 92.948,86.25 92.95,86.248 92.95,86.247
  region: 92.473,86.157 92.47,86.158 92.471,86.159 92.474,86.159
  region: 92.101,86.093 92.103,86.095 92.103,86.096 92.108,86.097 92.116,86.096 92.119,86.094 92.12,86.089 92.119,86.088 92.115,86.087 92.101,86.087 92.1,86.09
  region: 91.619,86.114 91.609,86.11 91.604,86.111 91.601,86.114 91.602,86.13 91.605,86.135 91.611,86.147 91.615,86.151 91.617,86.155 91.62,86.156 91.624,86.152 91.625,86.145 91.626,86.141 91.627,86.131 91.628,86.128 91.627,86.12 91.624,86.118 91.622,86.117
  region: 91.898,86.148 91.901,86.15 91.904,86.147 91.905,86.143 91.904,86.127 91.901,86.123 91.896,86.124 91.894,86.126 91.894,86.127 91.892,86.126 91.892,86.13 91.894,86.135 91.895,86.146
  region: 92.893,87.628 92.886,87.629 92.885,87.63 92.882,87.631 92.878,87.634 92.879,87.636 92.887,87.638 92.892,87.635 92.895,87.63
  region: 91.24,86.246 91.243,86.254 91.244,86.256 91.248,86.255 91.251,86.25 91.252,86.247 91.254,86.246 91.257,86.245 91.261,86.244 91.263,86.243 91.263,86.241 91.265,86.24 91.267,86.238 91.269,86.231 91.27,86.224 91.272,86.211 91.271,86.187 91.264,86.171 91.263,86.167 91.258,86.161 91.256,86.16 91.254,86.158 91.252,86.157 91.249,86.155 91.245,86.154 91.24,86.155 91.236,86.159 91.234,86.164 91.233,86.166 91.23,86.169 91.225,86.172 91.223,86.177 91.224,86.2 91.223,86.214 91.227,86.219 91.23,86.22 91.233,86.222 91.236,86.233 91.238,86.239 91.24,86.245
  region: 90.963,86.356 90.964,86.348 90.964,86.311 90.964,86.308 90.965,86.304 90.966,86.274 90.967,86.27 90.966,86.125 90.965,86.123 90.966,86.12 90.965,86.11 90.964,86.067 90.962,86.071 90.96,86.127 90.959,86.201 90.958,86.213 90.959,86.216 90.959,86.235 90.962,86.363 90.96,86.366 90.959,86.441 90.959,86.469 90.958,86.473 90.957,86.556 90.958,86.559 90.959,86.573 90.962,86.579 90.964,86.577 90.97,86.566 90.972,86.565 90.977,86.568 90.981,86.567 90.983,86.565 90.985,86.564 90.99,86.559 90.991,86.555 90.992,86.547 90.991,86.531 90.99,86.528 90.988,86.515 90.987,86.511 90.985,86.501 90.984,86.497 90.979,86.482 90.978,86.478 90.975,86.479 90.974,86.484 90.972,86.484 90.972,86.486 90.971,86.482 90.969,86.476 90.968,86.468 90.967,86.397 90.966,86.394 90.965,86.37 90.964,86.366 90.963,86.357
  region: 91.113,86.306 91.109,86.308 91.104,86.313 91.103,86.315 91.099,86.319 91.094,86.322 91.092,86.324 91.089,86.329 91.084,86.331 91.082,86.333 91.081,86.341 91.082,86.346 91.077,86.351 91.075,86.351 91.073,86.359 91.074,86.373 91.075,86.382 91.078,86.383 91.081,86.38 91.08,86.369 91.082,86.369 91.083,86.372 91.086,86.372 91.093,86.367 91.095,86.365 91.099,86.364 91.113,86.362 91.118,86.358 91.121,86.351 91.123,86.345 91.125,86.339 91.127,86.334 91.128,86.327 91.132,86.317 91.131,86.313 91.129,86.311 91.127,86.31 91.121,86.306
  region: 90.992,86.438 90.995,86.431 90.996,86.424 90.999,86.419 91.003,86.42 91.009,86.419 91.011,86.421 91.016,86.423 91.02,86.43 91.022,86.431 91.023,86.426 91.022,86.422 91.021,86.418 91.02,86.41 91.017,86.407 91.016,86.402 91.014,86.397 91.01,86.39 91.009,86.377 91.008,86.372 91.007,86.357 91.005,86.358 91.003,86.364 91.002,86.366 91,86.368 90.995,86.37 90.993,86.381 90.987,86.393 90.987,86.394 90.985,86.396 90.979,86.41 90.978,86.417 90.98,86.423 90.979,86.43 90.981,86.433 90.987,86.435 90.989,86.439 hole: 91.011,86.415 91.008,86.414 91.008,86.41 91.009,86.409 91.013,86.41 91.014,86.412
  region: 91.178,86.573 91.179,86.575 91.181,86.577 91.186,86.579 91.189,86.577 91.191,86.575 91.193,86.573 91.207,86.572 91.211,86.568 91.212,86.566 91.214,86.561 91.213,86.554 91.217,86.549 91.219,86.544 91.218,86.535 91.216,86.534 91.214,86.533 91.213,86.531 91.214,86.508 91.214,86.492 91.213,86.481 91.209,86.473 91.206,86.466 91.203,86.46 91.202,86.449 91.196,86.449 91.191,86.451 91.173,86.45 91.17,86.451 91.169,86.456 91.17,86.459 91.173,86.461 91.172,86.463 91.171,86.464 91.165,86.46 91.162,86.461 91.158,86.472 91.156,86.477 91.153,86.481 91.15,86.482 91.145,86.486 91.141,86.494 91.143,86.512 91.149,86.515 91.152,86.518 91.151,86.525 91.148,86.528 91.146,86.532 91.15,86.54 91.153,86.543 91.155,86.55 91.156,86.555 91.159,86.556 91.164,86.559 91.167,86.562 91.168,86.564 91.172,86.568 91.174,86.569
  region: 90.962,86.729 90.963,86.747 90.964,86.714 90.962,86.719 90.962,86.728
  region: 90.965,87.179 90.964,87.165 90.962,87.169 90.963,87.191 90.964,87.182 90.965,87.181
  region: 91.257,85.928 91.267,85.927 91.269,85.924 91.27,85.92 91.27,85.917 91.267,85.916 91.259,85.921 91.257,85.923 91.255,85.924 91.253,85.925 91.254,85.928 91.256,85.928
  region: 91.541,85.977 91.547,85.979 91.558,85.977 91.559,85.973 91.557,85.972 91.553,85.971 91.542,85.972 91.54,85.974
  region: 91.539,86.022 91.544,86.018 91.546,86.013 91.549,86.007 91.555,86.002 91.557,86.001 91.558,85.998 91.553,85.992 91.549,85.988 91.537,85.987 91.534,85.988 91.532,85.989 91.53,85.99 91.531,85.997 91.533,86.002 91.534,86.021 91.538,86.022
  region: 91.579,86.012 91.579,86.01 91.574,86.008 91.572,86.01 91.572,86.011 91.577,86.013
  region: 91.154,85.974 91.156,85.969 91.157,85.965 91.159,85.958 91.161,85.956 91.162,85.952 91.161,85.95 91.156,85.948 91.154,85.95 91.153,85.952 91.149,85.956 91.144,85.958 91.141,85.961 91.143,85.966 91.149,85.975 91.15,85.978 91.152,85.98 91.153,85.979 91.154,85.975
  region: 91.564,86.029 91.562,86.023 91.56,86.02 91.558,86.021 91.558,86.023 91.563,86.033 91.566,86.036 91.568,86.035 91.564,86.03
  region: 89.119,88.423 89.117,88.427 89.118,88.433
  region: 89.119,88.452 89.118,88.443 89.117,88.447 89.118,88.453 89.119,88.453
  region: 499 vertices and 2 holes, not listed, extent 92.034,86.064 92.217,87.506
  region: 92.394,86.773 92.395,86.794 92.394,86.802 92.393,86.805 92.394,86.808 92.395,86.812 92.401,86.821 92.402,86.827 92.403,86.83 92.404,86.835 92.403,86.847 92.405,86.851 92.408,86.853 92.415,86.852 92.417,86.851 92.416,86.839 92.415,86.836 92.416,86.824 92.418,86.819 92.419,86.799 92.42,86.796 92.419,86.793 92.418,86.789 92.417,86.778 92.418,86.775 92.417,86.765 92.415,86.763 92.411,86.762 92.405,86.763 92.402,86.765 92.4,86.766 92.394,86.771 92.394,86.772
  region: 92.223,86.29 92.224,86.288 92.225,86.287 92.226,86.286 92.228,86.285 92.23,86.282 92.232,86.28 92.234,86.275 92.235,86.248 92.236,86.245 92.237,86.238 92.243,86.217 92.244,86.211 92.246,86.205 92.242,86.196 92.241,86.176 92.24,86.172 92.238,86.162 92.238,86.141 92.239,86.137 92.238,86.131 92.236,86.126 92.237,86.123 92.24,86.12 92.241,86.113 92.24,86.109 92.237,86.106 92.235,86.105 92.226,86.101 92.215,86.102 92.209,86.106 92.207,86.111 92.212,86.116 92.209,86.119 92.207,86.12 92.208,86.126 92.211,86.139 92.212,86.145 92.213,86.149 92.212,86.163 92.214,86.171 92.216,86.179 92.214,86.199 92.213,86.202 92.212,86.21 92.213,86.213 92.212,86.22 92.21,86.225 92.21,86.249 92.212,86.254 92.213,86.258 92.217,86.261 92.218,86.271 92.219,86.284 92.218,86.285 92.22,86.29 hole: 92.224,86.118 92.222,86.118 92.218,86.117 92.218,86.115 92.219,86.113 92.225,86.112 92.227,86.114 92.227,86.117
  region: 91.587,86.332 91.586,86.326 91.585,86.316 91.584,86.31 91.581,86.307 91.579,86.305 91.572,86.302 91.569,86.303 91.566,86.31 91.565,86.319 91.566,86.323 91.568,86.335 91.569,86.339 91.572,86.343 91.576,86.344 91.582,86.343 91.584,86.342 91.585,86.34 91.587,86.334
  region: 92.375,86.43 92.377,86.431 92.379,86.428 92.382,86.423 92.383,86.418 92.383,86.414 92.382,86.407 92.381,86.403 92.378,86.399 92.376,86.399 92.373,86.401 92.372,86.406 92.373,86.426
  region: 92.299,86.519 92.298,86.512 92.296,86.51 92.301,86.504 92.303,86.496 92.304,86.492 92.306,86.486 92.307,86.482 92.306,86.475 92.305,86.472 92.304,86.455 92.303,86.451 92.302,86.439 92.297,86.434 92.293,86.433 92.284,86.428 92.283,86.426 92.28,86.425 92.276,86.429 92.275,86.438 92.282,86.448 92.283,86.452 92.284,86.484 92.288,86.494 92.29,86.502 92.292,86.508 92.292,86.51 92.289,86.517 92.292,86.522 92.298,86.521
  region: 92.948,86.521 92.949,86.497 92.948,86.36 92.946,86.359 92.944,86.366 92.945,86.516 92.946,86.519 92.945,86.562 92.944,86.641 92.945,86.644 92.946,86.646 92.948,86.642 92.949,86.634 92.948,86.607 92.949,86.559 92.948,86.556 92.949,86.548 92.948,86.525 92.948,86.522
  region: 92.562,86.575 92.56,86.564 92.562,86.56 92.563,86.549 92.564,86.532 92.565,86.529 92.566,86.515 92.565,86.483 92.564,86.48 92.562,86.468 92.561,86.463 92.56,86.459 92.562,86.456 92.56,86.447 92.557,86.44 92.556,86.427 92.546,86.407 92.541,86.41 92.54,86.412 92.535,86.424 92.534,86.431 92.533,86.448 92.532,86.451 92.533,86.467 92.534,86.471 92.533,86.49 92.534,86.5 92.535,86.511 92.534,86.514 92.535,86.525 92.537,86.53 92.538,86.534 92.537,86.551 92.538,86.556 92.537,86.581 92.536,86.584 92.535,86.604 92.538,86.613 92.537,86.637 92.538,86.664 92.539,86.667 92.54,86.688 92.549,86.697 92.552,86.696 92.556,86.692 92.558,86.687 92.56,86.68 92.561,86.623 92.562,86.614 92.56,86.611 92.562,86.576
  region: 92.236,86.601 92.237,86.6 92.236,86.597 92.236,86.584 92.234,86.582 92.232,86.581 92.226,86.583 92.222,86.584 92.22,86.587 92.218,86.595 92.218,86.601 92.22,86.607 92.221,86.609 92.225,86.614 92.229,86.613 92.232,86.61 92.233,86.608 92.236,86.603
  region: 92.555,86.711 92.554,86.707 92.552,86.705 92.551,86.703 92.548,86.702 92.547,86.704 92.548,86.71 92.551,86.716 92.555,86.715 92.555,86.712
  region: 91.974,86.777 91.97,86.775 91.969,86.78 91.97,86.782 91.974,86.78
  region: 92.947,86.27 92.948,86.267 92.946,86.267 92.946,86.269
  region: 92.948,87.142 92.949,87.074 92.948,86.955 92.946,86.952 92.944,86.959 92.943,86.986 92.944,87.124 92.945,87.134 92.946,87.145 92.945,87.149 92.944,87.159 92.945,87.168 92.944,87.171 92.944,87.185 92.944,87.214 92.945,87.217 92.946,87.232 92.947,87.223 92.948,87.211 92.949,87.171 92.948,87.168 92.948,87.143
  region: 92.945,87.541 92.946,87.558 92.947,87.538 92.945,87.54
  region: 92.865,87.627 92.868,87.629 92.873,87.631 92.875,87.631 92.873,87.626 92.869,87.623 92.866,87.624
  region: 91.139,85.903 91.143,85.907 91.146,85.906 91.148,85.904 91.147,85.899 91.143,85.894 91.138,85.894 91.136,85.895 91.137,85.9 91.139,85.902
  region: 91.022,85.964 91.02,85.955 91.018,85.949 91.017,85.945 91.016,85.936 91.015,85.933 91.013,85.928 91.012,85.925 91.013,85.922 91.015,85.914 91.014,85.903 91.013,85.9 91.014,85.889 91.018,85.888 91.022,85.887 91.024,85.884 91.023,85.88 91.025,85.878 91.029,85.877 91.034,85.876 91.037,85.874 91.036,85.871 91.034,85.87 91.029,85.871 91.026,85.874 91.022,85.875 91.017,85.874 91.015,85.871 91.014,85.869 91.011,85.864 91.008,85.861 91.004,85.86 90.998,85.861 90.997,85.863 91,85.87 90.999,85.872 90.997,85.874 90.995,85.875 90.993,85.876 90.995,85.884 90.997,85.889 90.996,85.899 90.995,85.902 90.993,85.919 90.994,85.925 90.991,85.934 90.99,85.938 90.989,85.952 90.987,85.956 90.988,85.96 90.989,85.978 90.99,85.981 90.992,85.986 90.996,85.991 91,85.992 91.008,85.991 91.011,85.99 91.018,85.986 91.022,85.979 91.023,85.971 91.022,85.968
  region: 91.143,85.919 91.139,85.92 91.136,85.922 91.141,85.928 91.145,85.931 91.146,85.933 91.15,85.94 91.152,85.942 91.154,85.941 91.155,85.935 91.156,85.931 91.155,85.927 91.154,85.925 91.147,85.922
  region: 91.133,85.945 91.129,85.944 91.128,85.946 91.127,85.95 91.128,85.952 91.129,85.954 91.132,85.955 91.135,85.953 91.136,85.95
  region: 91.151,85.988 91.152,85.991 91.153,85.987 91.151,85.984 91.151,85.987
Bottom Layer:
  pour cut-out: 21.463,114.3 26.289,114.3 26.289,104.14 21.463,104.14 21.463,103.759
  pour cut-out: 72.644,112.212 72.644,116.657 86.741,116.657 86.741,112.212
  pour cut-out: 96.205,117.165 96.205,111.45 105.407,111.45 105.407,117.165
  pour cut-out: 117.795,100.909 117.795,93.924 128.082,93.924 128.082,100.927
  pour cut-out: 83.124,100.782 83.124,94.991 92.776,94.991 92.776,100.782
  pour cut-out: 94.681,62.936 94.681,53.411 99.253,53.411 99.253,62.936
  pour cut-out: 84.698,51.633 92.985,51.633 92.985,54.427 84.698,54.427
  pour cut-out: 117.795,49.601 132.908,49.601 132.908,53.919 117.795,53.919
  pour cut-out: 151.069,54.3 151.069,51.252 163.067,51.252 163.067,54.3
  pour cut-out: 131.003,62.555 131.003,60.015 133.797,60.015 133.797,62.555
  pour cut-out: 82.87,30.551 78.298,30.551 78.298,20.645 82.997,20.645

## Silkscreen, mask and mechanical layers (free items; w line width, h text height)
Top Overlay:
  text "24V battery_MD" at 27.432,113.919 h1.52 r270
  text "24V battery" at 58.166,113.665 h1.52 r270
  text "12V out_buck" at 127.889,100.711 h1.52
  text "24V In_buck" at 68.072,100.203 h1.52
  text "24V In_buck" at 98.044,100.203 h1.52
  text "5V out_buck" at 157.226,100.203 h1.52
  text "24V_MD" at 10.414,86.36 h1.52
  text "Switch_5V" at 184.912,76.073 h1.52
  text "24V_In_Buck" at 10.414,67.564 h1.52
  text "12V_Out_Buck" at 10.414,45.889 h1.52
  text "12V_backup" at 180.914,28.011 h1.52 r90
  text "12V_MD" at 10.414,25.654 h1.52
  text "Cams_3" at 129.997,4.064 h1.52
  text "Cams_1" at 99.719,3.937 h1.52
  text "Cams_2" at 114.604,3.937 h1.52
  text "Video_enc" at 145.39,3.81 h1.52
  text "Transceiver" at 48.006,3.683 h1.52
  text "Motherboard" at 76.962,3.683 h1.52
  text "Jetson" at 165.1,3.683 h1.52
Bottom Overlay:
  drawing of 61 lines, arcs and shapes, not listed
  text "\"With great power comes great responsibility\"" at 79.883,4.826 h1.52
  text "Sanidhya_Singhal" at 178.181,4.826 h1.52
Mechanical 1:
  lines w0.254: 197.988,119.893 cw(c197.988,118.364) 199.517,118.364 199.517,2.6 cw(c197.808,2.6) 197.808,0.891 3.841,0.889 cw(c3.841,2.698) 2.032,2.698 2.026,118.742 cw(c3.18,118.742) 3.18,119.896 198.115,119.888

## Text inside footprints (layer, text, board x,y; h text height)
J12: Top Overlay "+" at 46.675,116.636 h1.52 r270; Top Overlay "-" at 46.167,92.636 h1.52 r270
J21: Top Overlay "+" at 15.875,116.509 h1.52 r270; Top Overlay "-" at 15.367,92.509 h1.52 r270